# EAGLE board shift register (EAGLE 9.7.0)

Size 469.14 x 307.49 mm. Coordinates in mm from the lower left corner, seen from the top.
Outline: 0,0 469.14,0 469.14,307.49 0,307.49 0,0
Copper layers (1*16): Top 0.035mm / dielectric 1.5mm / Bottom 0.035mm
Design rules "default": minimum track width 6mil, minimum drill 0.35mm, track to track 6mil, track to pad 6mil, pad to pad 6mil, via to via 6mil, smd to smd 6mil, copper to edge 40mil, drill to drill 6mil, minimum pad ring 10mil, minimum via ring 8mil, stop-mask expansion 4mil, vias tented up to drill 0mil, thermal gap 10mil

## Footprints (pad centres in the part's own frame; a part is rotated, then mirrored left to right if it is on the bottom)
BATTERY-GENERIC = drill 1.118 pad 3.15 octagon: + 2.54,0; - -2.54,0
LEDRD254W60D565H860B = drill 0.981 pad 1.581: 1 -1.27,0; 2 1.27,0
RESAD1016W63L850D250B = drill 0.83 pad 1.43: 1 -5.08,0; 2 5.08,0
HA-06-SM065 = drill 1 pad 1.676: 1 -2.54,-2.54; 2 0,2.54; 3 2.54,-2.54
SWITCH-MOMENTARY-PTH-6.5MM = drill 1.016 pad 1.88: 1 -3.251,2.261; 2 3.251,2.261; 3 -3.251,-2.261; 4 3.251,-2.261
SWITCH-SPDT-PTH-8.5X3.7MM = drill 1.016 pad 1.88: 1 -2.54,0; 2 0,0; 3 2.54,0
ARDUINO-UNO-R3-SHIELD = drill 1.016 pad 1.88: 3.3V 24.13,-2.54; 5V 24.13,0; A0 24.13,12.7; A1 24.13,15.24; A2 24.13,17.78; A3 24.13,20.32; A4 24.13,22.86; A5 24.13,25.4; AREF -24.13,-13.97; D2 -24.13,20.32; D3 -24.13,17.78; D4 -24.13,15.24; D5 -24.13,12.7; D6 -24.13,10.16; D7 -24.13,7.62; D8 -24.13,3.81; D9 -24.13,1.27; D10 -24.13,-1.27; D11 -24.13,-3.81; D12 -24.13,-6.35; D13 -24.13,-8.89; GND@0 24.13,2.54; GND@1 24.13,5.08; GND@2 -24.13,-11.43; IOREF 24.13,-7.62; NC 24.13,-10.16; RES 24.13,-5.08; RX -24.13,25.4; SCL -24.13,-19.05; SDA -24.13,-16.51; TX -24.13,22.86; VIN 24.13,7.62

## Placement (x,y rotation side)
BAT1  9V  [BATTERY-GENERIC]  460.89,229.51 270 top
BAT2  9V  [BATTERY-GENERIC]  304.21,149.75 270 top
BAT3  9V  [BATTERY-GENERIC]  348.46,8.26 270 top
BAT4  9V  [BATTERY-GENERIC]  68.22,24.34 270 top
D1  RED  [LEDRD254W60D565H860B]  231.8,276.32 180 top
D2  RED  [LEDRD254W60D565H860B]  239.42,276.32 180 top
D3  RED  [LEDRD254W60D565H860B]  247.04,276.32 180 top
D4  RED  [LEDRD254W60D565H860B]  254.66,276.32 180 top
D5  RED  [LEDRD254W60D565H860B]  441.88,299.44 0 top
D6  RED  [LEDRD254W60D565H860B]  263.35,188.73 180 top
D7  RED  [LEDRD254W60D565H860B]  330.72,53.22 180 top
D8  RED  [LEDRD254W60D565H860B]  330.66,43.07 180 top
D9  RED  [LEDRD254W60D565H860B]  330.66,30.48 180 top
D10  RED  [LEDRD254W60D565H860B]  6.06,33.46 180 top
D11  RED  [LEDRD254W60D565H860B]  16.11,33.5 180 top
D12  RED  [LEDRD254W60D565H860B]  28.18,33.5 180 top
R1  500  [RESAD1016W63L850D250B]  230.53,268.7 90 top
R2  500  [RESAD1016W63L850D250B]  238.15,268.7 90 top
R3  500  [RESAD1016W63L850D250B]  245.77,268.7 90 top
R4  500  [RESAD1016W63L850D250B]  253.39,268.7 90 top
R5  1k  [RESAD1016W63L850D250B]  447.8,271.24 90 top
R6  1k  [RESAD1016W63L850D250B]  40.05,33.48 0 top
R7  1k  [RESAD1016W63L850D250B]  264.62,183.65 90 top
R8  500  [RESAD1016W63L850D250B]  343.38,6.99 0 top
R9  1k  [RESAD1016W63L850D250B]  212.75,250.92 90 top
RPOT1  10k  [HA-06-SM065]  282.2,194.14 0 top
S1  SWITCH_MOMENTARY  [SWITCH-MOMENTARY-PTH-6.5MM]  422.33,256.81 90 top
S2  SWITCH_MOMENTARY  [SWITCH-MOMENTARY-PTH-6.5MM]  210.21,267.43 90 top
S3  TOGGLE  [SWITCH-SPDT-PTH-8.5X3.7MM]  294.55,157.48 0 top
S4  SWITCH_MOMENTARY  [SWITCH-MOMENTARY-PTH-6.5MM]  336.19,17.88 90 top
S5  SWITCH_MOMENTARY  [SWITCH-MOMENTARY-PTH-6.5MM]  52.96,29.59 90 top
U2  ARDUINO-UNO-R3-SHIELD  [ARDUINO-UNO-R3-SHIELD]  153.1,269.14 270 top

## Library data of the parts
BAT1-BAT4 R1-R9 RPOT1 S1-S5 U2 = Tinkercad
D1-D12 = Tinkercad; CATEGORY: Opto-Electronic; SUB-CATEGORY: LED; VALUE: LED_RED

## Nets
BAT1+: BAT1.+ S1.1
BAT1-: BAT1.- R5.1
BAT2+: BAT2.+ S3.2
BAT2-: BAT2.- D6.2
BAT3+: BAT3.+ R8.2
BAT3-: BAT3.- D7.2 D8.2 D9.2
BAT4+: BAT4.+ S5.3
BAT4-: BAT4.- D10.2
D1_C: D1.2 R1.2
D2_C: D2.2 R2.2
D3_C: D3.2 R3.2
D4_C: D4.2 R4.2
D5_C: D5.2 R5.2
D6_A: D6.1 R7.2
D10_A: D10.1 D11.2
D12_A: D12.1 R6.1
R7_1: R7.1 RPOT1.1
S1_4: D5.1 S1.4
S3_O: RPOT1.2 S3.1
S4_2: D7.1 D8.1 D9.1 S4.2
S4_3: R8.1 S4.3
S5_2: R6.2 S5.2
U2_5V: S2.1 S2.2 U2.5V
U2_D2: D1.1 U2.D2
U2_D3: D2.1 U2.D3
U2_D4: D3.1 U2.D4
U2_D5: D4.1 U2.D5
U2_D13: R9.2 S2.3 S2.4 U2.D13
U2_GND: R1.1 R2.1 R3.1 R4.1 R9.1 U2.GND@0 U2.GND@1 U2.GND@2

## Tracks (layer width: path | path; a pad name or v marks a point on that pad's centre or on a via)
BAT1+  (1 unrouted)
BAT1-  (1 unrouted)
BAT2+  (1 unrouted)
BAT2-  (1 unrouted)
BAT3+  (1 unrouted)
BAT3-  (3 unrouted)
BAT4+  (1 unrouted)
BAT4-  (1 unrouted)
D1_C  (1 unrouted)
D2_C  (1 unrouted)
D3_C  (1 unrouted)
D4_C  (1 unrouted)
D5_C  (1 unrouted)
D6_A  (1 unrouted)
D10_A  (1 unrouted)
D12_A  (1 unrouted)
R7_1  (1 unrouted)
S1_4  (1 unrouted)
S3_O  (1 unrouted)
S4_2  (3 unrouted)
S4_3  (1 unrouted)
S5_2  (1 unrouted)
U2_5V  (2 unrouted)
U2_D2  (1 unrouted)
U2_D3  (1 unrouted)
U2_D4  (1 unrouted)
U2_D5  (1 unrouted)
U2_D13  (3 unrouted)
U2_GND  (7 unrouted)